# EAGLE board EKSR Instrument Rev B (EAGLE 9.7.0)
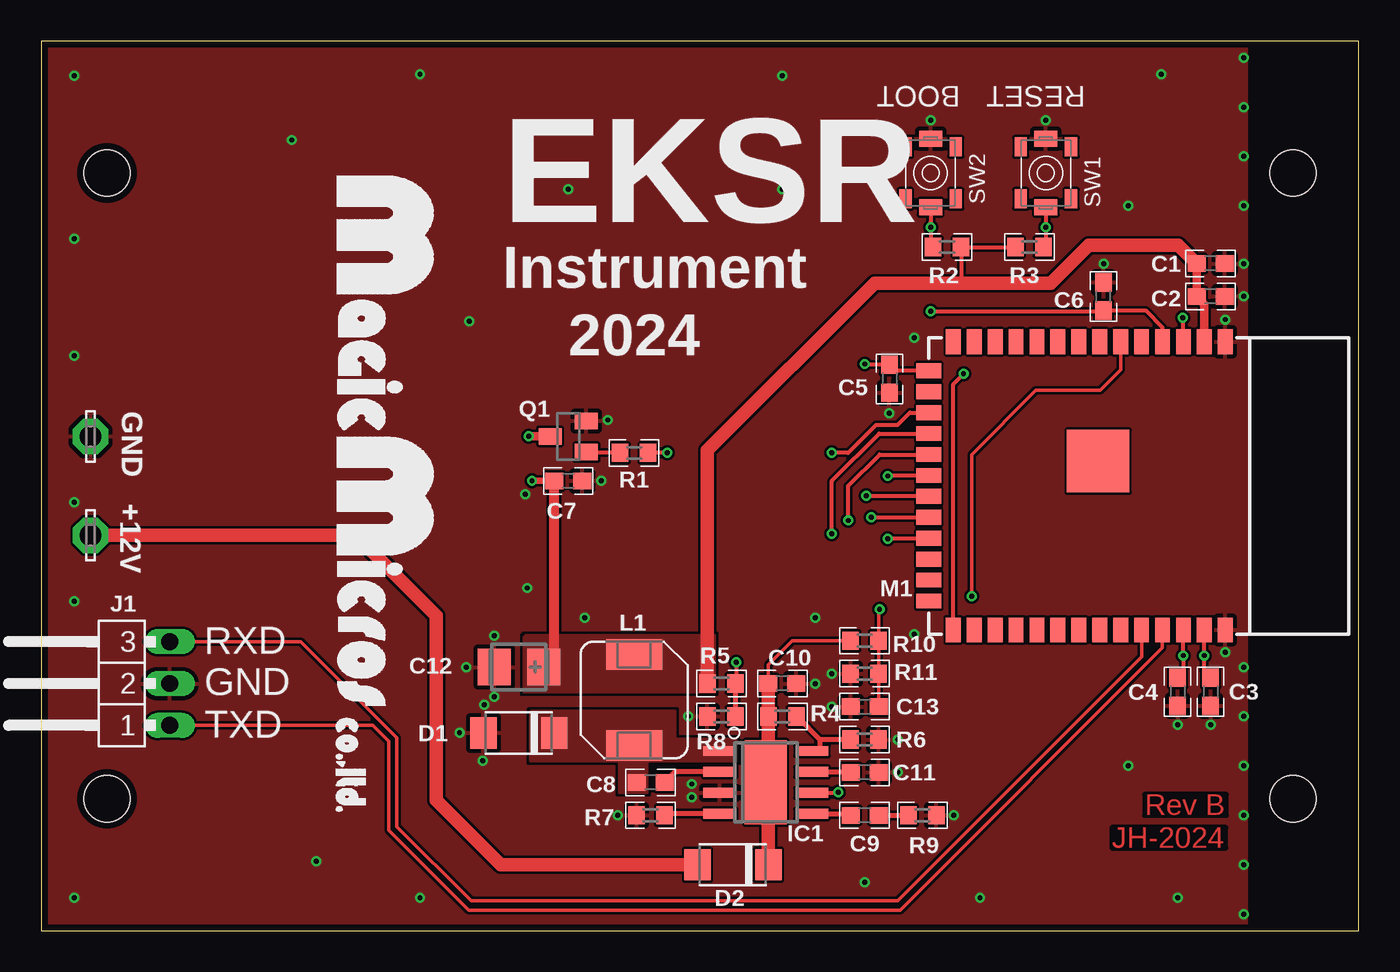
[diagram p0: board, top side]
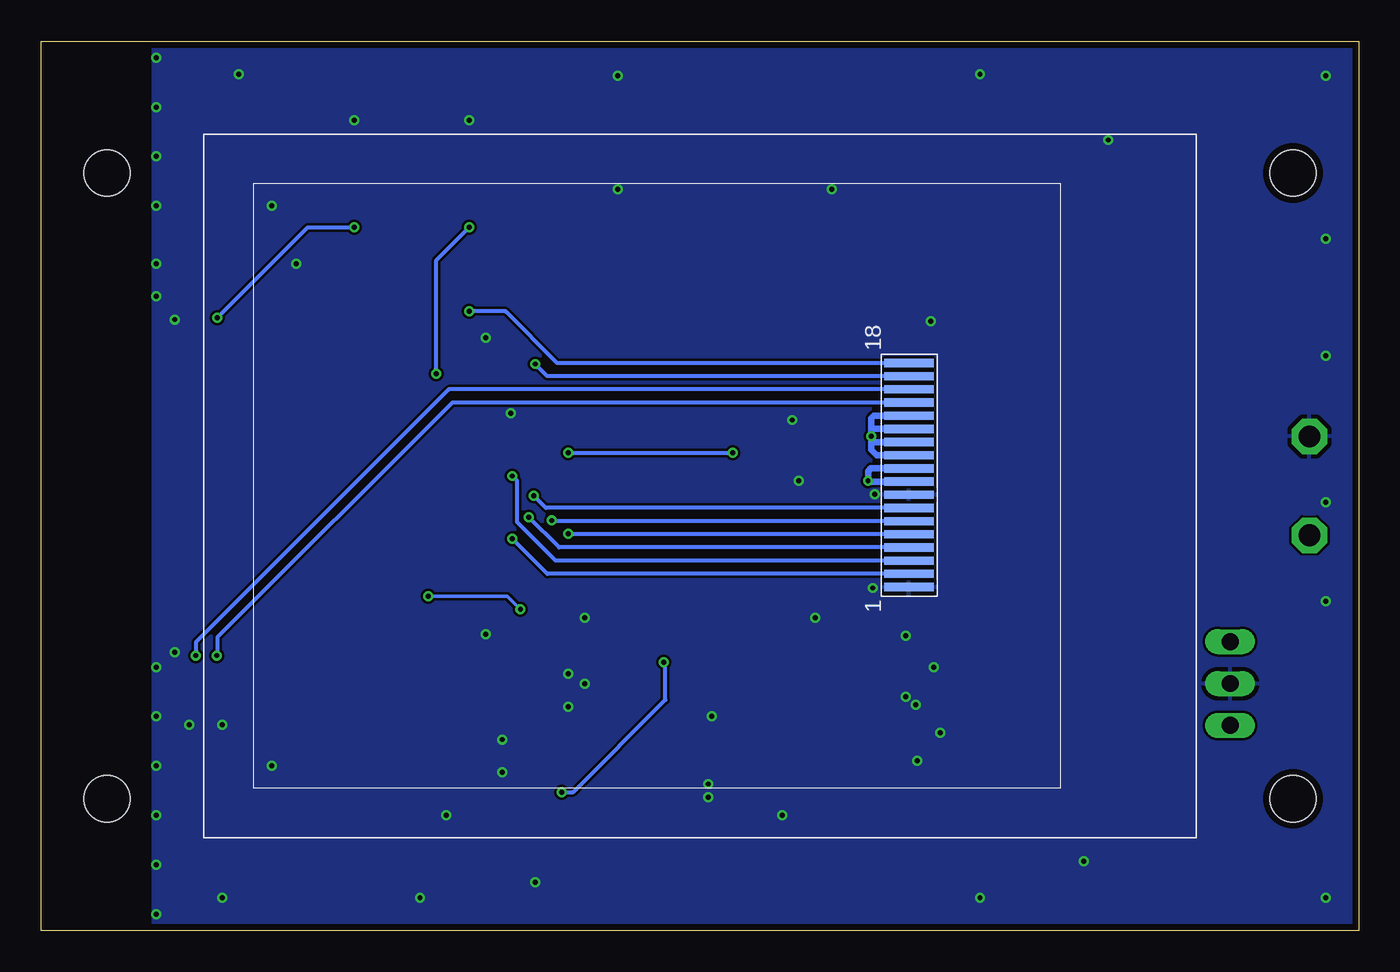
[diagram p1: board, bottom side, seen from below]

Size 80 x 54 mm. Coordinates in mm from the lower left corner, seen from the top.
Outline: 0,0 80,0 80,54 0,54 0,0
Copper layers (1*16): Top 1mil / dielectric 1.55mm / Bottom 1mil
Design rules "pcbwing-protoype-2-layer": minimum track width 6mil, minimum drill 0.3mm, track to track 6mil, track to pad 6mil, pad to pad 6mil, via to via 6mil, smd to smd 6mil, copper to edge 0.4mm, drill to drill 0.2mm, minimum pad ring 8mil, minimum via ring 6mil, stop-mask expansion 0mil, vias tented up to drill 0.3mm, thermal gap 10mil
Holes 2.8 mm at 4,46 4,8 76,46 76,8

## Footprints (pad centres in the part's own frame; a part is rotated, then mirrored left to right if it is on the bottom)
LSP13 = drill 1.321 pad 2.159 octagon: MP 0,0
C0603 = smd 1.1 x 1: 1 -0.85,0; 2 0.85,0
CT3528 = smd 2 x 2.2: + -1.5,0; - 1.5,0
DO221-AC = smd 1.6 x 1.9: A -2.15,0; C 2.15,0
TFT_2.4_A2 = smd 3 x 0.5: 1 12.68,-6.14; 2 12.68,-5.34; 3 12.68,-4.54; 4 12.68,-3.74; 5 12.68,-2.94; 6 12.68,-2.14; 7 12.68,-1.34; 8 12.68,-0.54; 9 12.68,0.26; 10 12.68,1.06; 11 12.68,1.86; 12 12.68,2.66; 13 12.68,3.46; 14 12.68,4.26; 15 12.68,5.06; 16 12.68,5.86; 17 12.68,6.66; 18 12.68,7.46
SO8_EDP = smd 0.6 x 2: 1 -1.905,-2.8; 2 -0.635,-2.8; 3 0.635,-2.8; 4 1.905,-2.8; 5 1.905,2.8; 6 0.635,2.8; 7 -0.635,2.8; 8 -1.905,2.8 | smd 5.1 x 2.56: PAD 0,0
MA03-1W = drill 1.016 long: 1 -2.54,-3.81; 2 0,-3.81; 3 2.54,-3.81
SPM6530 = smd 1.85 x 3.4: 1 -2.775,0; 2 2.775,0
ESP32-S3-WROOM = smd 1.5 x 0.9: 1 -8.75,8.89; 2 -8.75,7.62; 3 -8.75,6.35; 4 -8.75,5.08; 5 -8.75,3.81; 6 -8.75,2.54; 7 -8.75,1.27; 8 -8.75,0; 9 -8.75,-1.27; 10 -8.75,-2.54; 11 -8.75,-3.81; 12 -8.75,-5.08; 13 -8.75,-6.35; 14 -8.75,-7.62; 27 8.75,-7.62; 28 8.75,-6.35; 29 8.75,-5.08; 30 8.75,-3.81; 31 8.75,-2.54; 32 8.75,-1.27; 33 8.75,0; 34 8.75,1.27; 35 8.75,2.54; 36 8.75,3.81; 37 8.75,5.08; 38 8.75,6.35; 39 8.75,7.62; 40 8.75,8.89 | smd 0.9 x 1.5: 15 -6.985,-9.11; 16 -5.715,-9.11; 17 -4.445,-9.11; 18 -3.175,-9.11; 19 -1.905,-9.11; 20 -0.635,-9.11; 21 0.635,-9.11; 22 1.905,-9.11; 23 3.175,-9.11; 24 4.445,-9.11; 25 5.715,-9.11; 26 6.985,-9.11 | smd 3.8 x 3.8: CENTER_PAD -1.5,1.17
SOT-23 = smd 1 x 1.4: 1 -0.95,-1.1; 2 0.95,-1.1; 3 0,1.1
R0603 = smd 1 x 1.1: 1 -0.85,0; 2 0.85,0
PTS820 = smd 0.95 x 1.4: 1 -2.08,0; 2 2.08,0 | smd 1.15 x 0.75: P$1 -1.58,1.53; P$2 1.58,1.53; P$3 -1.58,-1.53; P$4 1.58,-1.53

## Placement (x,y rotation side)
+12V  LSP13  [LSP13]  3,24 90 top
C1  10u  [C0603]  71,40.5 0 top
C2  100n  [C0603]  71,38.5 0 top
C3  10n  [C0603]  71,14.5 270 top
C4  10n  [C0603]  69,14.5 270 top
C5  10n  [C0603]  51.5,33.5 270 top
C6  10n  [C0603]  64.5,38.5 90 top
C7  10u  [C0603]  32,27.3 0 top
C8  100n  [C0603]  37,9 180 top
C9  1n5  [C0603]  50,7 0 top
C10  10u  [C0603]  45,15 0 top
C11  10n  [C0603]  50,9.6 0 top
C12  100u/10  [CT3528]  29,16 180 top
C13  10u  [C0603]  50,13.6 180 top
D1  SL54AFL  [DO221-AC]  29,12 0 top
D2  SL54AFL  [DO221-AC]  42,4 0 top
DISP1  TFT_2.4_A"  [TFT_2.4_A2]  40,27 0 bottom
GND  LSP13  [LSP13]  3,30 90 top
IC1  AOZ1284PI  [SO8_EDP]  44,9 270 top
J1  [MA03-1W]  4,15 90 top
L1  10uH  [SPM6530]  36,14 90 top
M1  ESP32-S3-WROOM  [ESP32-S3-WROOM]  63,27 270 top
Q1  [SOT-23]  32,30 90 top
R1  1k  [R0603]  36,29 180 top
R2  10k  [R0603]  55,41.5 0 top
R3  10k  [R0603]  60,41.5 180 top
R4  100k  [R0603]  45,13 180 top
R5  31k6  [R0603]  41.3,15 180 top
R6  10k  [R0603]  50,11.6 180 top
R7  47k  [R0603]  37,7 0 top
R8  10k  [R0603]  41.3,13 0 top
R9  180k  [R0603]  53.5,7 180 top
R10  11k8  [R0603]  50,17.6 180 top
R11  787R  [R0603]  50,15.6 0 top
SW1  [PTS820]  61,46 270 top
SW2  [PTS820]  54,46 270 top

## Library data of the parts
+12V GND = solpad
C1-C13 = mm_rcl; SPICEPREFIX: C
D1 D2 = mm_diode
DISP1 J1 M1 Q1 = jesper
IC1 SW1 SW2 = TestLib
L1 = mm_indmag
R1-R11 = mm_rcl; SPICEPREFIX: R

## Nets
!LCD_CS: DISP1.5 M1.18
!LCD_RESET: DISP1.2 M1.23
+3V3: C1.1 C2.1 C7.1 C12.+ DISP1.9 DISP1.10 L1.2 M1.2 R2.2 R3.2 R5.2
+12V: C10.1 D2.C IC1.PAD R4.2 R10.2
ADC_IN: C13.1 M1.6 R10.1 R11.2
DBG_RXD: J1.3 M1.36
DBG_TXD: J1.1 M1.37
ESP_BOOT: M1.27 R2.1 SW2.2
ESP_EN: M1.3 R3.1 SW1.2
GND: C1.2 C2.2 C3.2 C4.2 C5.2 C6.2 C7.2 C10.2 C11.2 C12.- C13.2 D1.A DISP1.1 DISP1.8 GND.MP IC1.3 J1.2 M1.1 M1.40 Q1.2 R6.1 R7.1 R8.1 R9.1 R11.1 SW1.1 SW2.1
LCD_BL: M1.17 R1.1
LCD_MISO: DISP1.7 M1.21
LCD_MOSI: DISP1.6 M1.19
LCD_RS: DISP1.4 M1.22
LCD_SCK: DISP1.3 M1.20
LCD_XL: C4.1 DISP1.15 M1.38
LCD_XR: C5.1 DISP1.17 M1.15
LCD_YD: C6.1 DISP1.18 M1.4
LCD_YU: C3.1 DISP1.16 M1.39
N$1: IC1.6 R5.1 R8.2
N$2: Q1.1 R1.2
N$3: DISP1.11 DISP1.12 DISP1.13 DISP1.14 Q1.3
N$4: +12V.MP D2.A
N$33: IC1.8 R4.1 R6.2
N$38: C8.1 IC1.2
N$39: IC1.4 R7.2
N$41: C11.1 IC1.7
N$53: C9.2 R9.2
N$54: C9.1 IC1.5
SW: C8.2 D1.C IC1.1 L1.1

## Tracks (layer width: path | path; a pad name or v marks a point on that pad's centre or on a via)
!LCD_CS  (via drill 0.3)
  Top 0.254: v48,24.1 48,27.3 50.88,30.18 M1.18
  Bottom 0.254: DISP1.5 47.96,24.06 v48,24.1
!LCD_RESET  (via drill 0.3)
  Top 0.254: v51.4,23.8 53.87,23.8 M1.23
  Bottom 0.254: DISP1.2 49.26,21.66 v51.4,23.8
+3V3  (via drill 0.3)
  Top 0.254: R3.2 R2.2 55.85,39.35 55.8,39.3
  Top 0.406: v29.8,27.3 C7.1
  Top 0.508: M1.2 70.62,38.03 C2.1 70.15,40.35 70.1,40.4 70.1,40.45 C1.1
  Top 0.61: C12.+ 31.15,16.65 C7.1
  Top 0.813: R5.2 40.45,29.15 50.6,39.3 55.8,39.3 61.3,39.3 63.6,41.6 69.05,41.6 C1.1
  Bottom 0.406: DISP1.10 29.64,28.06 29.8,27.9 v29.8,27.3 29.76,27.26 DISP1.9
  pour Top (no thermals): 29.33,14.53 40.87,14.53 40.87,17.87 29.43,17.87 29.41,17.83 29.37,17.79 29.33,17.77
+12V
  Top 0.203: C10.1 44.15,16.15 45.6,17.6 R10.2
  Top 0.813: C10.1 R4.2 44.15,9.15 IC1.PAD 44.15,8.85 D2.C
ADC_IN  (via drill 0.3)
  Top 0.203: R11.2 50.85,17.5 R10.1 50.85,19.45 v50.9,19.5 | R11.2 50.85,15.55 50.9,15.5 50.9,15.55 R11.2 | R11.2 C13.1 | M1.6 65.54,34.04 64.3,32.8 60.4,32.8 56.5,28.9 v56.5,20.3
  Bottom 0.203: v56.5,20.3 51.7,20.3 v50.9,19.5
DBG_RXD
  Top 0.203: M1.36 66.81,16.61 52,1.8 26.1,1.8 21.6,6.3 21.6,11.7 15.76,17.54 J1.3
DBG_TXD
  Top 0.203: M1.37 68.08,17.18 52.14,1.24 25.95,1.24 21.1,6.1 21.1,11.5 20.14,12.46 J1.1
ESP_BOOT  (via drill 0.3)
  Top 0.254: SW2.2 54,43 v54,42.7 54,41.8 54.2,41.6 54.2,41.55 R2.1 | M1.27 55.38,33.18 v56,33.8
  Bottom 0.254: v56,33.8 56,40.7 v54,42.7
ESP_EN  (via drill 0.3)
  Top 0.254: SW1.2 61,42.9 v61,42.7 61,41.65 R3.1 | 69.4,35.8 M1.3 69.35,37.15 v69.3,37.2
  Bottom 0.254: v69.3,37.2 63.8,42.7 v61,42.7
GND  (via drill 0.3)
  other vias: 25.4,12 26.9,13.7 26.8,10.3 27.5,14.2 25.8,16 27.5,17.9 35,7 55.4,7 52,9.6 52,11.6 47,15 39.3,13 39.5,8.9 39.5,8.1 71.9,16.9 71.9,37.1 73,38.5 73,40.5 61,49.2 54,49.2 29.5,20.8 34,27.3 34.4,31 29.4,26.5 64.5,40.5 51.5,31.4 71,12.5 69,12.5 73,16 73,13 73,10 73,7 73,4 73,1 73,53 73,50 73,47 73,44 68,52 45,51.9 23,52 2,51.9 2,42 2,34.9 2,26 2,20 2,2 23,2 57,2 69,2 66,10 66,44 53,18 53,36 26,37 16.7,4.2 15.2,48 32,45 45,45 33,19 47,19 48,15.6 48,13.6 50,2.94
  pour Bottom (rank 2): -0.87,-0.87 73.17,-0.87 73.17,54.87 -0.87,54.87
  pour Top (rank 2): -0.87,-0.87 73.17,-0.87 73.17,54.87 -0.87,54.87
LCD_BL  (via drill 0.3)
  Top 0.254: M1.17 52.74,31.45 52,30.7 50.7,30.7 49,29 v48,29 | v38,29 R1.1
  Bottom 0.254: v48,29 v38,29
LCD_MISO  (via drill 0.3)
  Top 0.254: v50.1,26.4 53.86,26.4 M1.21
  Bottom 0.254: DISP1.7 49.36,25.66 v50.1,26.4
LCD_MOSI  (via drill 0.3)
  Top 0.254: v49,24.9 49,27 50.9,28.9 M1.19
  Bottom 0.254: DISP1.6 48.96,24.86 v49,24.9
LCD_RS  (via drill 0.3)
  Top 0.254: v50.4,25.1 M1.22
  Bottom 0.254: DISP1.4 48.56,23.26 v50.4,25.1
LCD_SCK  (via drill 0.3)
  Top 0.254: v51.4,27.6 51.44,27.64 M1.20
  Bottom 0.254: DISP1.3 48.76,22.46 51.1,24.8 51.1,27.3 v51.4,27.6
LCD_XL  (via drill 0.3)
  Top 0.254: M1.38 v69.35,16.7 69.35,15.7 C4.1
  Bottom 0.254: DISP1.15 55.04,32.06 69.3,17.8 69.3,16.65 v69.35,16.7
LCD_XR  (via drill 0.3)
  Top 0.254: v50,34.4 51.45,34.4 C5.1 51.87,33.98 M1.15
  Bottom 0.254: DISP1.17 49.26,33.66 v50,34.4
LCD_YD  (via drill 0.3)
  Top 0.254: M1.4 68.08,36.62 67.05,37.65 C6.1 64.45,37.6 v54,37.6
  Bottom 0.254: DISP1.18 48.66,34.46 51.8,37.6 v54,37.6
LCD_YU  (via drill 0.3)
  Top 0.254: M1.39 v70.62,16.7 70.62,15.73 C3.1
  Bottom 0.254: DISP1.16 55.24,32.86 70.6,17.5 70.6,16.72 v70.62,16.7
N$1  (via drill 0.3)
  Top 0.254: IC1.6 48.27,8.36 48.3,8.4 v48.4,8.4 | v42.2,16.3 42.2,15.05 R5.1
  Top 0.305: R5.1 R8.2
  Bottom 0.254: v48.4,8.4 47.7,8.4 42.1,14 42.1,16.2 v42.2,16.3
N$2
  Top 0.254: Q1.1 34.95,29.05 35,29 R1.2
N$3  (via drill 0.3)
  Top 0.508: v29.6,30 Q1.3
  Bottom 0.254: 29.56,29.66 29.6,29.7 | 29.54,30.46 29.6,30.4
  Bottom 0.406: DISP1.14 29.44,31.26 29.6,31.1 29.6,30.4 v29.6,30 29.6,29.7 29.6,29.2 29.26,28.86 DISP1.11 | DISP1.12 29.56,29.66 | DISP1.13 29.54,30.46
N$4
  Top 0.813: D2.A 27.9,4 24,7.9 24,19.1 19.1,24 +12V.MP
N$33
  Top 0.305: R6.2 47.3,11.6 | 47.3,11.6 45.9,13 R4.1 | IC1.8 47.3,11 47.3,11.6
N$38
  Top 0.305: IC1.2 38.48,9.64 C8.1
N$39
  Top 0.305: IC1.4 37.95,7.09 R7.2
N$41
  Top 0.305: IC1.7 49.12,9.64 C11.1
N$53
  Top 0.305: C9.2 R9.2
N$54
  Top 0.305: IC1.5 49.05,7.09 C9.1
SW
  pour Top (no thermals): 35.11,10.27 35.13,10.23 35.13,8.43 36.77,8.43 36.77,10.23 36.79,10.27 36.83,10.31 36.87,10.33 42.17,10.33 42.17,11.57 38.57,11.57 38.53,11.59 38.49,11.63 38.47,11.67 38.47,13.27 29.73,13.27 29.73,10.33 35.03,10.33 35.07,10.31

## Text on the board
Top: Rev B | JH-2024
tPlace: BOOT | RESET | EKSR | Instrument | 2024 | RXD | GND | TXD